# Altium PCB ZMBo.PcbDoc (part 3 of 3)
Units mil, origin at the board's own origin, x right, y up, seen from the top; angles counter-clockwise.
Board outline 6000 x 4000 mil, 4 copper layers (Top Layer, Groun Plane, Power Plane, Bottom Layer); 254 components, 259 nets, 1004 pads, 1790 vias.
Unrouted connection lines stored in the file: 212.
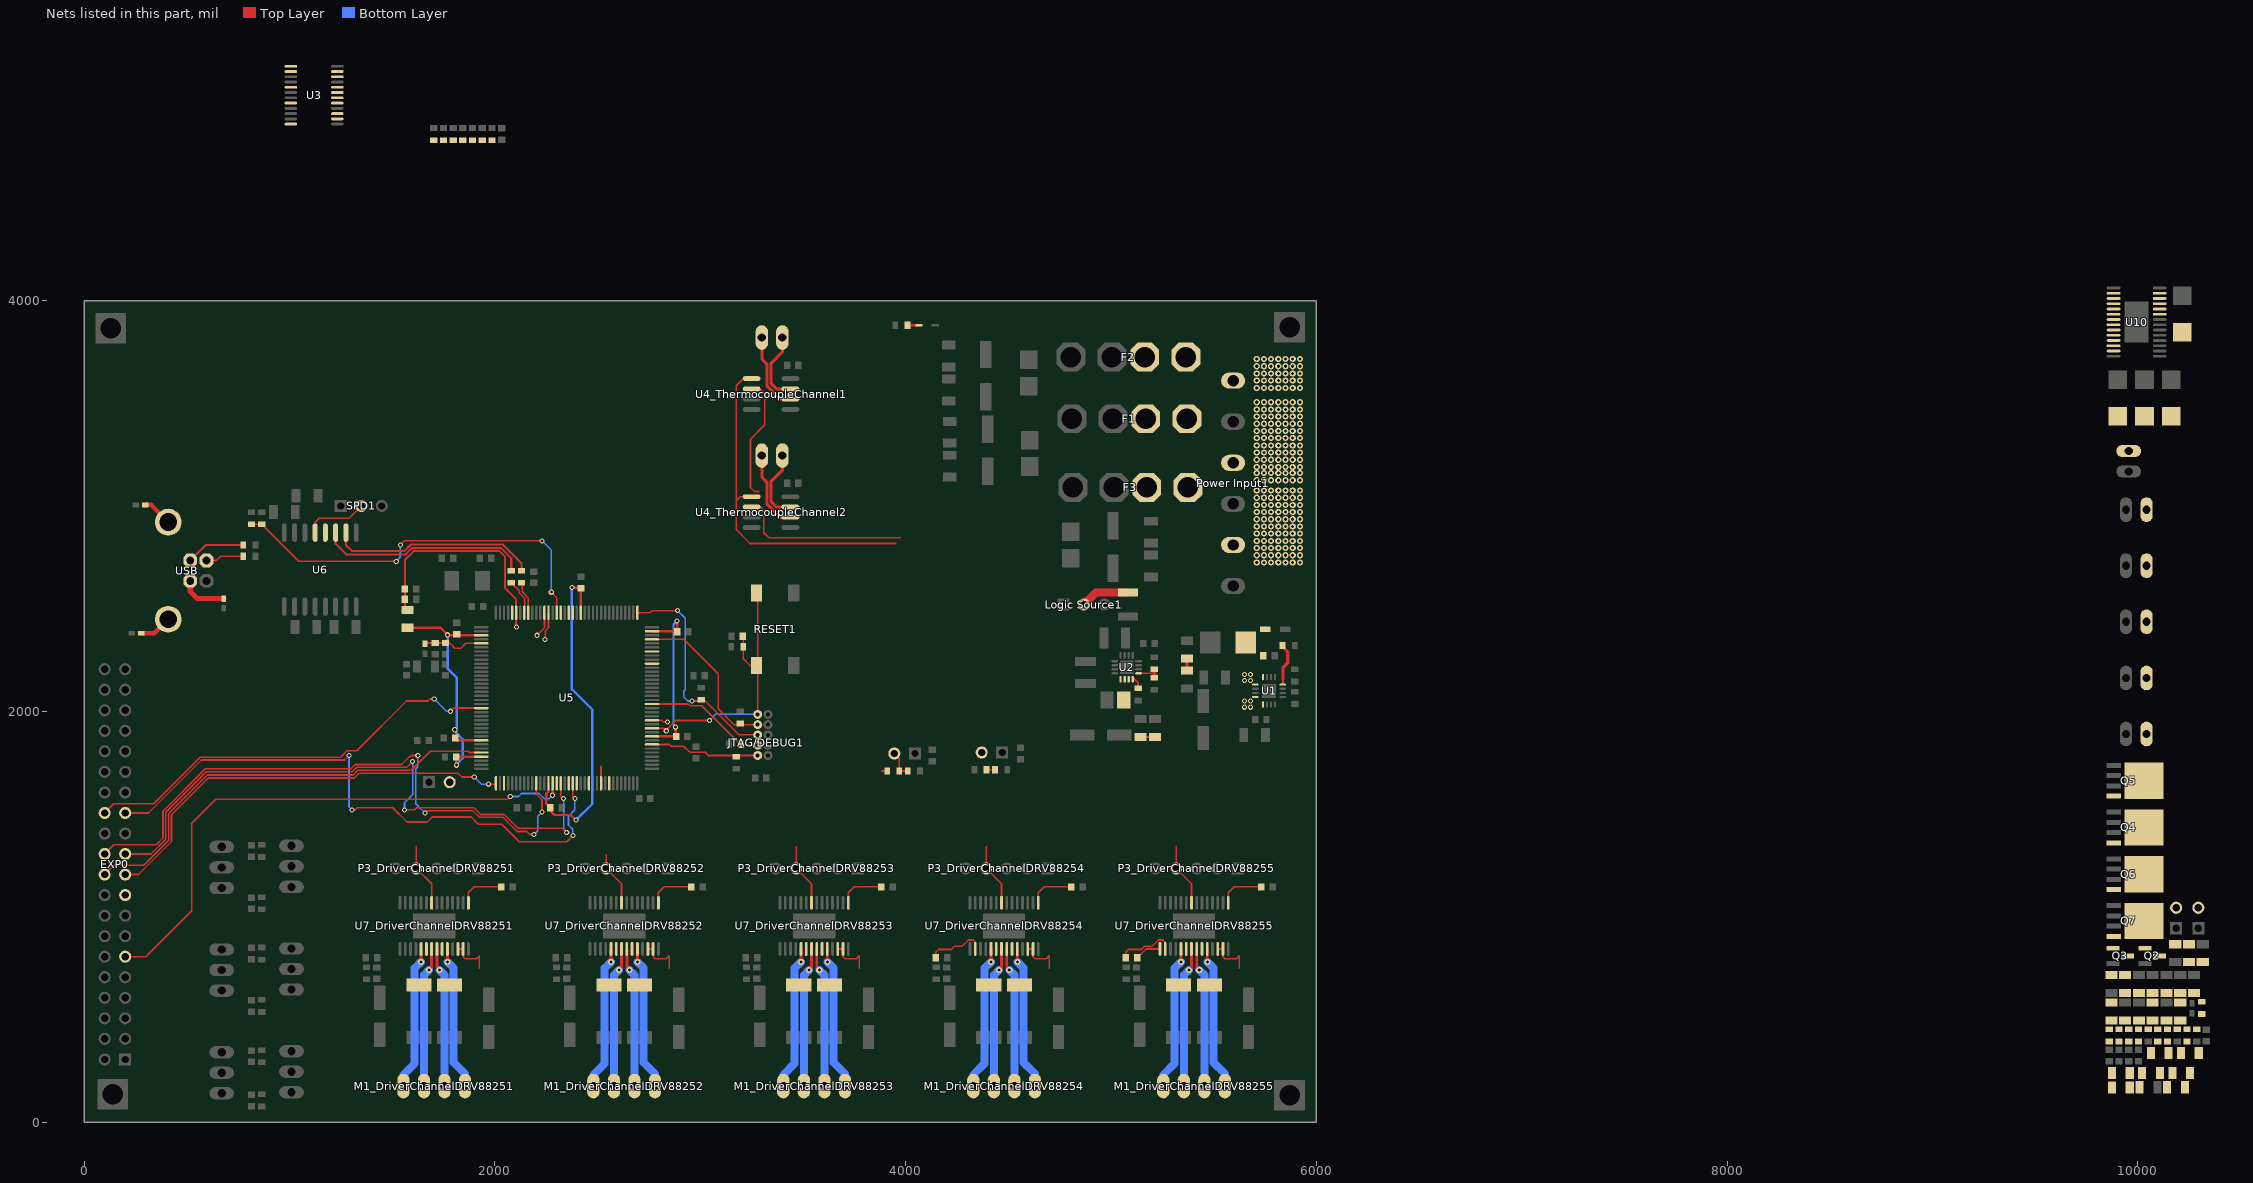
[diagram p5: the nets of this part, all layers, seen from the top]

## Via types
v1: diameter 30, hole 15, Top Layer to Bottom Layer, 1265 vias
v2: diameter 25, hole 15, Top Layer to Bottom Layer, 405 vias
v3: diameter 19.68, hole 7.87, Top Layer to Bottom Layer, 90 vias
v4: diameter 50, hole 20, Top Layer to Bottom Layer, 28 vias
v5: diameter 30, hole 20, Top Layer to Bottom Layer, 2 vias

## Nets (pads, with @x,y where several pads share a name; then routed paths per layer and width w, separated by ;. In a path a pad name is that pad's centre, name@x,y a point inside that pad or via, vN(x,y) a via of type N, cw(c..) or ccw(c..) an arc to the next point about the centre after c; other vN are vias at no path point) (continued)
NetC68_DriverChannelDRV88254_2: C68_DriverChannelDRV88254.2 U7_DriverChannelDRV88254.2 | length 280.9
  Top Layer w8: C68_DriverChannelDRV88254.2@4147.44,800 4147.44,827.44 4160,840 4222.76,840 4239.56,856.8 4276.8,856.8 4306.26,886.26 4328.74,886.26 4339.25,875.75 U7_DriverChannelDRV88254.2@4339.25,842.8
NetC68_DriverChannelDRV88255_1: C68_DriverChannelDRV88255.1 U7_DriverChannelDRV88255.1 | length 128.8
  Top Layer w8: C68_DriverChannelDRV88255.1@5127.56,800 5170.35,842.8 U7_DriverChannelDRV88255.1@5238.66,842.8
NetC68_DriverChannelDRV88255_2: C68_DriverChannelDRV88255.2 U7_DriverChannelDRV88255.2 | length 280.9
  Top Layer w8: C68_DriverChannelDRV88255.2@5072.44,800 5072.44,827.44 5085,840 5147.76,840 5164.56,856.8 5201.8,856.8 5231.26,886.26 5253.74,886.26 5264.25,875.75 U7_DriverChannelDRV88255.2@5264.25,842.8
NetC71_DriverChannelDRV88251_2: C71_DriverChannelDRV88251.2 U7_DriverChannelDRV88251.15 | length 222.1
  Top Layer w8: U7_DriverChannelDRV88251.15@1871.34,1067.2 1871.34,1116.34 1900,1145 C71_DriverChannelDRV88251.2@2032.44,1145
NetC71_DriverChannelDRV88252_2: C71_DriverChannelDRV88252.2 U7_DriverChannelDRV88252.15 | length 222.1
  Top Layer w8: U7_DriverChannelDRV88252.15@2796.34,1067.2 2796.34,1116.34 2825,1145 C71_DriverChannelDRV88252.2@2957.44,1145
NetC71_DriverChannelDRV88253_2: C71_DriverChannelDRV88253.2 U7_DriverChannelDRV88253.15 | length 222.1
  Top Layer w8: U7_DriverChannelDRV88253.15@3721.34,1067.2 3721.34,1116.34 3750,1145 C71_DriverChannelDRV88253.2@3882.44,1145
NetC71_DriverChannelDRV88254_2: C71_DriverChannelDRV88254.2 U7_DriverChannelDRV88254.15 | length 222.1
  Top Layer w8: U7_DriverChannelDRV88254.15@4646.34,1067.2 4646.34,1116.34 4675,1145 C71_DriverChannelDRV88254.2@4807.44,1145
NetC71_DriverChannelDRV88255_2: C71_DriverChannelDRV88255.2 U7_DriverChannelDRV88255.15 | length 222.1
  Top Layer w8: U7_DriverChannelDRV88255.15@5571.34,1067.2 5571.34,1116.34 5600,1145 C71_DriverChannelDRV88255.2@5732.44,1145
NetD1_2: D1.2 R1.1 | length 56.1
  Top Layer w12: R1.1@4009.53,3880 D1.2@4065.63,3880
NetD7_2: D7.2 R8.1 | length 58.5
  Top Layer w15: R8.1@5370,2198.31 D7.2@5370,2256.77
NetD9_2: D9.2 R11.1 | length 70.5
  Top Layer w10: R11.1@5144.58,1875 5215,1875 D9.2@5215.08,1875.08
NetD10_1: D10.1 R13.2
NetD10_2: D10.2 FAN-1.2 Q2.3 R14.2
NetD11_1: D11.1 R47.2 R48.2
NetD11_2: D11.2 FAN-2.2 Q3.3
NetD12_1: D12.1 D13.2 FAN-0.2 Q4.5 R57.2
NetD13_1: D13.1 R56.1
NetD14_1: D14.1 R60.1
NetD14_2: D14.2 D15.1 HEATBED.2 Q5.5 R61.2
NetD16_1: D16.1 R64.1
NetD16_2: D16.2 D17.1 HEAT-0.2 Q6.5 R65.2
NetD18_1: D18.1 R68.1
NetD18_2: D18.2 D19.1 HEAT-1.2 Q7.5 R69.2
NetDBGEN1_2: DBGEN1.2 R22.2 R29.1 | length 40.9
  Top Layer w8: R22.2@4394.53,1715 R29.1@4435.47,1715
NetEXP0_17: EXP0.17
NetF1_1: "Power Input1.3" F1.1
  other v1: 5710,3125 5745,3125 5780,3125 5815,3125 5850,3125 5885,3125 5920,3125 5710,3160 5745,3160 5780,3160 5815,3160 5850,3160 5885,3160 5920,3160 5710,3190 5745,3190 5780,3190 5815,3190 5850,3190 5885,3190 5920,3190 5710,3225 5745,3225 5780,3225 5815,3225 5850,3225 5885,3225 5920,3225 5710,3260 5745,3260 5780,3260 5815,3260 5850,3260 5885,3260 5920,3260 5710,3295 5745,3295 5780,3295 5815,3295 5850,3295 5885,3295 5920,3295 5710,3330 5745,3330 5780,3330 5815,3330 5850,3330 5885,3330 5920,3330 5710,3365 5745,3365 5780,3365 5815,3365 5850,3365 5885,3365 5920,3365 5710,3400 5745,3400 5780,3400 5815,3400 5850,3400 5885,3400 5920,3400 5710,3435 5745,3435 5780,3435 5815,3435 5850,3435 5885,3435 5920,3435 5710,3470 5745,3470 5780,3470 5815,3470 5850,3470 5885,3470 5920,3470 5710,3505 5745,3505 5780,3505 5815,3505 5850,3505 5885,3505 5920,3505
NetF2_1: "Power Input1.1" F2.1
  other v1: 5710,3575 5745,3575 5780,3575 5815,3575 5850,3575 5885,3575 5920,3575 5710,3610 5745,3610 5780,3610 5815,3610 5850,3610 5885,3610 5920,3610 5710,3645 5745,3645 5780,3645 5815,3645 5850,3645 5885,3645 5920,3645 5710,3680 5745,3680 5780,3680 5815,3680 5850,3680 5885,3680 5920,3680 5710,3715 5745,3715 5780,3715 5815,3715 5850,3715 5885,3715 5920,3715
NetF3_1: "Power Input1.5" F3.1
  other v1: 5710,2725 5745,2725 5780,2725 5815,2725 5850,2725 5885,2725 5920,2725 5710,2760 5745,2760 5780,2760 5815,2760 5850,2760 5885,2760 5920,2760 5710,2795 5745,2795 5780,2795 5815,2795 5850,2795 5885,2795 5920,2795 5710,2830 5745,2830 5780,2830 5815,2830 5850,2830 5885,2830 5920,2830 5710,2865 5745,2865 5780,2865 5815,2865 5850,2865 5885,2865 5920,2865 5710,2900 5745,2900 5780,2900 5815,2900 5850,2900 5885,2900 5920,2900 5710,2935 5745,2935 5780,2935 5815,2935 5850,2935 5885,2935 5920,2935 5710,2970 5745,2970 5780,2970 5815,2970 5850,2970 5885,2970 5920,2970 5710,3005 5745,3005 5780,3005 5815,3005 5850,3005 5885,3005 5920,3005 5710,3040 5745,3040 5780,3040 5815,3040 5850,3040 5885,3040 5920,3040 5710,3075 5745,3075 5780,3075 5815,3075 5850,3075 5885,3075 5920,3075
NetF4_2: "Logic Source1.2" F4.2 | length 239.5
  Top Layer w40: 4868.58,2520.04 4927.64,2579.09 F4.2@5083.58,2579.09
NetFB6_2: FB6.2 USB.6 | length 159.5
  Top Layer w22: FB6.2@278.62,2380 342,2380 USB.6@410,2448
NetFB7_2: FB7.2 USB.4 | length 229.2
  Top Layer w25: USB.4@517,2635 517,2583 551.38,2548.62 FB7.2@680,2548.62
NetFB8_2: FB8.2 USB.5 | length 146.1
  Top Layer w22: FB8.2@298.62,3005 326.22,3005 USB.5@410,2921.22
"NetFET kRESET_2": "FET kRESET.2" "FET MCU RESET.2" R49.1
NetL2_1: L2.1 U2.1 U2.2 U2.3
NetM1_DriverChannelDRV88251_1: M1_DriverChannelDRV88251.1 U7_DriverChannelDRV88251.5 | length 703.4
  Top Layer w14: v1(1641.02,780) U7_DriverChannelDRV88251.5@1641.02,842.8
  Bottom Layer w39: M1_DriverChannelDRV88251.1@1555,175 1555,230 1610,285 1610,748.98 v1(1641.02,780)
NetM1_DriverChannelDRV88251_2: M1_DriverChannelDRV88251.2 U7_DriverChannelDRV88251.7 | length 683.2
  Top Layer w14: v1(1680,740) 1692.2,752.2 U7_DriverChannelDRV88251.7@1692.2,842.8
  Bottom Layer w39: M1_DriverChannelDRV88251.2@1655,175 1655,715 v1(1680,740)
NetM1_DriverChannelDRV88251_3: M1_DriverChannelDRV88251.3 U7_DriverChannelDRV88251.8 | length 665.9
  Top Layer w14: 1717.8,753.23 U7_DriverChannelDRV88251.8@1717.8,842.8
  Bottom Layer w39: v1(1730,741.02) 1755,716.02 M1_DriverChannelDRV88251.3@1755,175
NetM1_DriverChannelDRV88251_4: M1_DriverChannelDRV88251.4 U7_DriverChannelDRV88251.10 | length 700
  Top Layer w14: v1@1768.98,782.98 U7_DriverChannelDRV88251.10@1768.98,842.8
  Bottom Layer w39: v1(1770,780) 1800,750 1800,290 1855,235 M1_DriverChannelDRV88251.4@1855,175
NetM1_DriverChannelDRV88252_1: M1_DriverChannelDRV88252.1 U7_DriverChannelDRV88252.5 | length 703.4
  Top Layer w14: v1(2566.02,780) U7_DriverChannelDRV88252.5@2566.02,842.8
  Bottom Layer w39: M1_DriverChannelDRV88252.1@2480,175 2480,230 2535,285 2535,748.98 v1(2566.02,780)
NetM1_DriverChannelDRV88252_2: M1_DriverChannelDRV88252.2 U7_DriverChannelDRV88252.7 | length 683.2
  Top Layer w14: v1(2605,740) 2617.2,752.2 U7_DriverChannelDRV88252.7@2617.2,842.8
  Bottom Layer w39: M1_DriverChannelDRV88252.2@2580,175 2580,715 v1(2605,740)
NetM1_DriverChannelDRV88252_3: M1_DriverChannelDRV88252.3 U7_DriverChannelDRV88252.8 | length 665.9
  Top Layer w14: 2642.8,753.23 U7_DriverChannelDRV88252.8@2642.8,842.8
  Bottom Layer w39: v1(2655,741.02) 2680,716.02 M1_DriverChannelDRV88252.3@2680,175
NetM1_DriverChannelDRV88252_4: M1_DriverChannelDRV88252.4 U7_DriverChannelDRV88252.10 | length 700
  Top Layer w14: v1@2693.98,782.98 U7_DriverChannelDRV88252.10@2693.98,842.8
  Bottom Layer w39: v1(2695,780) 2725,750 2725,290 2780,235 M1_DriverChannelDRV88252.4@2780,175
NetM1_DriverChannelDRV88253_1: M1_DriverChannelDRV88253.1 U7_DriverChannelDRV88253.5 | length 703.4
  Top Layer w14: v1(3491.02,780) U7_DriverChannelDRV88253.5@3491.02,842.8
  Bottom Layer w39: M1_DriverChannelDRV88253.1@3405,175 3405,230 3460,285 3460,748.98 v1(3491.02,780)
NetM1_DriverChannelDRV88253_2: M1_DriverChannelDRV88253.2 U7_DriverChannelDRV88253.7 | length 683.2
  Top Layer w14: v1(3530,740) 3542.2,752.2 U7_DriverChannelDRV88253.7@3542.2,842.8
  Bottom Layer w39: M1_DriverChannelDRV88253.2@3505,175 3505,715 v1(3530,740)
NetM1_DriverChannelDRV88253_3: M1_DriverChannelDRV88253.3 U7_DriverChannelDRV88253.8 | length 665.9
  Top Layer w14: 3567.8,753.23 U7_DriverChannelDRV88253.8@3567.8,842.8
  Bottom Layer w39: v1(3580,741.02) 3605,716.02 M1_DriverChannelDRV88253.3@3605,175
NetM1_DriverChannelDRV88253_4: M1_DriverChannelDRV88253.4 U7_DriverChannelDRV88253.10 | length 700
  Top Layer w14: v1@3618.98,782.98 U7_DriverChannelDRV88253.10@3618.98,842.8
  Bottom Layer w39: v1(3620,780) 3650,750 3650,290 3705,235 M1_DriverChannelDRV88253.4@3705,175
NetM1_DriverChannelDRV88254_1: M1_DriverChannelDRV88254.1 U7_DriverChannelDRV88254.5 | length 703.4
  Top Layer w14: v1(4416.02,780) U7_DriverChannelDRV88254.5@4416.02,842.8
  Bottom Layer w39: M1_DriverChannelDRV88254.1@4330,175 4330,230 4385,285 4385,748.98 v1(4416.02,780)
NetM1_DriverChannelDRV88254_2: M1_DriverChannelDRV88254.2 U7_DriverChannelDRV88254.7 | length 683.2
  Top Layer w14: v1(4455,740) 4467.2,752.2 U7_DriverChannelDRV88254.7@4467.2,842.8
  Bottom Layer w39: M1_DriverChannelDRV88254.2@4430,175 4430,715 v1(4455,740)
NetM1_DriverChannelDRV88254_3: M1_DriverChannelDRV88254.3 U7_DriverChannelDRV88254.8 | length 665.9
  Top Layer w14: 4492.8,753.23 U7_DriverChannelDRV88254.8@4492.8,842.8
  Bottom Layer w39: v1(4505,741.02) 4530,716.02 M1_DriverChannelDRV88254.3@4530,175
NetM1_DriverChannelDRV88254_4: M1_DriverChannelDRV88254.4 U7_DriverChannelDRV88254.10 | length 700
  Top Layer w14: v1@4543.98,782.98 U7_DriverChannelDRV88254.10@4543.98,842.8
  Bottom Layer w39: v1(4545,780) 4575,750 4575,290 4630,235 M1_DriverChannelDRV88254.4@4630,175
NetM1_DriverChannelDRV88255_1: M1_DriverChannelDRV88255.1 U7_DriverChannelDRV88255.5 | length 703.4
  Top Layer w14: v1(5341.02,780) U7_DriverChannelDRV88255.5@5341.02,842.8
  Bottom Layer w39: M1_DriverChannelDRV88255.1@5255,175 5255,230 5310,285 5310,748.98 v1(5341.02,780)
NetM1_DriverChannelDRV88255_2: M1_DriverChannelDRV88255.2 U7_DriverChannelDRV88255.7 | length 683.2
  Top Layer w14: v1(5380,740) 5392.2,752.2 U7_DriverChannelDRV88255.7@5392.2,842.8
  Bottom Layer w39: M1_DriverChannelDRV88255.2@5355,175 5355,715 v1(5380,740)
NetM1_DriverChannelDRV88255_3: M1_DriverChannelDRV88255.3 U7_DriverChannelDRV88255.8 | length 665.9
  Top Layer w14: 5417.8,753.23 U7_DriverChannelDRV88255.8@5417.8,842.8
  Bottom Layer w39: v1(5430,741.02) 5455,716.02 M1_DriverChannelDRV88255.3@5455,175
NetM1_DriverChannelDRV88255_4: M1_DriverChannelDRV88255.4 U7_DriverChannelDRV88255.10 | length 700
  Top Layer w14: v1@5468.98,782.98 U7_DriverChannelDRV88255.10@5468.98,842.8
  Bottom Layer w39: v1(5470,780) 5500,750 5500,290 5555,235 M1_DriverChannelDRV88255.4@5555,175
NetQ2_1: Q2.1 R45.2
NetQ3_1: Q3.1 R52.2
NetQ4_4: Q4.4 R58.2
NetQ5_4: Q5.4 R62.2
NetQ6_4: Q6.4 R66.2
NetQ7_4: Q7.4 R70.2
NetR12_1: R12.1 U2.4 | length 60.4
  Top Layer w10: U2.4@5106.11,2156.24 5114.65,2156.24 5132.58,2138.31 R12.1@5132.58,2111.83
NetR14_1: R14.1 U10.3
NetR15_1: R15.1 R16.1 U5.129 | length 1945.3
  Top Layer w8: R15.1@815,2910.47 R16.1@865,2910.47 1045.47,2730 v2(1520,2730) ; v2(1540,2810) 1560,2830 v2(2230,2830) ; v2(2275,2580) 2300.79,2554.21 U5.129@2300.79,2480.35
  Bottom Layer w8: v2(1520,2730) 1540,2750 v2(1540,2810) ; v2(2230,2830) 2275,2785 v2(2275,2580)
NetR17_2: R17.2 U6.10 | length 1014.4
  Top Layer w10: U6.10@1275,2870.12 1275,2810 1305,2780 1559.75,2780 1591.75,2812 2038,2812 2130,2720 R17.2@2130,2684.53
NetR18_2: R18.2 USB.2 | length 188.1
  Top Layer w8: USB.2@596,2734.21 644.21,2734.21 665,2755 R18.2@775.47,2755
NetR19_2: R19.2 U6.11 | length 1026.6
  Top Layer w10: U6.11@1225,2870.12 1225,2815 1276,2764 1566.37,2764 1598.37,2796 2029.86,2796 2080,2745.86 R19.2@2080,2684.53
NetR20_2: R20.2 USB.3 | length 294
  Top Layer w10: USB.3@517,2734.21 592.79,2810 765.47,2810 R20.2@775.47,2820
NetR23_2: R23.2 R28.2 TRST1.2 | length 136.1
  Top Layer w8: TRST1.2@3945.47,1794.53 3970,1770 R23.2@3970,1709.53 R28.2@4010.94,1709.53
NetR31_1: R31.1 U3.1 U3.12 U3.15 U3.18 U3.19 U3.22
NetR32_DriverChannelDRV88251_2: R32_DriverChannelDRV88251.2 U7_DriverChannelDRV88251.9
NetR32_DriverChannelDRV88252_2: R32_DriverChannelDRV88252.2 U7_DriverChannelDRV88252.9
NetR32_DriverChannelDRV88253_2: R32_DriverChannelDRV88253.2 U7_DriverChannelDRV88253.9
NetR32_DriverChannelDRV88254_2: R32_DriverChannelDRV88254.2 U7_DriverChannelDRV88254.9
NetR32_DriverChannelDRV88255_2: R32_DriverChannelDRV88255.2 U7_DriverChannelDRV88255.9
NetR33_DriverChannelDRV88251_2: R33_DriverChannelDRV88251.2 U7_DriverChannelDRV88251.6
NetR33_DriverChannelDRV88252_2: R33_DriverChannelDRV88252.2 U7_DriverChannelDRV88252.6
NetR33_DriverChannelDRV88253_2: R33_DriverChannelDRV88253.2 U7_DriverChannelDRV88253.6
NetR33_DriverChannelDRV88254_2: R33_DriverChannelDRV88254.2 U7_DriverChannelDRV88254.6
NetR33_DriverChannelDRV88255_2: R33_DriverChannelDRV88255.2 U7_DriverChannelDRV88255.6
NetR37_1: R37.1 R38.2 U2.5 | length 117.4
  Top Layer w8: U2.5@5134.65,2184.78 5211.11,2184.78
  Top Layer w20: R37.1@5211.58,2163.83 R38.2@5211.58,2204.78
NetR39_1: R39.1 U5.65
NetR40_1: R40.1 U5.63 | length 83
  Top Layer w8: U5.63@2517.32,1649.65 2517.32,1732.68
NetR41_1: R41.1 U5.60
NetR42_1: R42.1 U5.57
NetR43_1: R43.1 U5.55
NetR44_1: R44.1 U5.52
NetR45_1: R45.1 R46.1 U10.2
NetR48_1: R48.1 U10.5
NetR49_2: R49.2 U10.27
NetR50_2: R50.2 U10.26
NetR51_2: R51.2 U10.25
NetR52_1: R52.1 R55.1 U10.4
NetR53_2: R53.2 U10.24
NetR54_2: R54.2 U10.23
NetR57_1: R57.1 U10.7
NetR58_1: R58.1 R59.1 U10.6
NetR61_1: R61.1 U10.9
NetR62_1: R62.1 R63.1 U10.8
NetR65_1: R65.1 U10.11
NetR66_1: R66.1 R67.1 U10.10
NetR69_1: R69.1 U10.13
NetR70_1: R70.1 R71.1 U10.12
NetSPD1_2: SPD1.2 U6.13 | length 308
  Top Layer w8: U6.13@1125,2870.12 1125,2920 1145,2940 1290,2940 SPD1.2@1350,3000
NetT2_ThermocoupleChannel1_1: T2_ThermocoupleChannel1.1 U4_ThermocoupleChannel1.3 | length 351.9
  Top Layer w15: T2_ThermocoupleChannel1.1@3400,3820 3400,3749.49 3345.51,3695 3345.51,3595 3370.51,3570 U4_ThermocoupleChannel1.3@3439.49,3570
NetT2_ThermocoupleChannel1_2: T2_ThermocoupleChannel1.2 U4_ThermocoupleChannel1.2 | length 386.5
  Top Layer w15: T2_ThermocoupleChannel1.2@3300,3820 3300,3715.51 3324.51,3691 3324.51,3586 3390.51,3520 U4_ThermocoupleChannel1.2@3439.49,3520
NetT2_ThermocoupleChannel2_1: T2_ThermocoupleChannel2.1 U4_ThermocoupleChannel2.3 | length 351.9
  Top Layer w15: T2_ThermocoupleChannel2.1@3400,3245 3400,3174.49 3345.51,3120 3345.51,3020 3370.51,2995 U4_ThermocoupleChannel2.3@3439.49,2995
NetT2_ThermocoupleChannel2_2: T2_ThermocoupleChannel2.2 U4_ThermocoupleChannel2.2 | length 386.5
  Top Layer w15: T2_ThermocoupleChannel2.2@3300,3245 3300,3140.51 3324.51,3116 3324.51,3011 3390.51,2945 U4_ThermocoupleChannel2.2@3439.49,2945
NetU5_140: U5.140 U6.12
PG: R9.2 U1.8 | length 214
  Top Layer w10: U1.8@5836.93,2129.53 5836.93,2155
  Top Layer w15: 5836.93,2155 5836.93,2211.93 5861,2236 5861,2289 5836.93,2313.07 R9.2@5836.93,2323.54
POT_CS: U3.5 U5.39
REF: U7_DriverChannelDRV88251.12 U7_DriverChannelDRV88251.13 U7_DriverChannelDRV88252.12 U7_DriverChannelDRV88252.13 U7_DriverChannelDRV88253.12 U7_DriverChannelDRV88253.13 U7_DriverChannelDRV88254.12 U7_DriverChannelDRV88254.13 U7_DriverChannelDRV88255.12 U7_DriverChannelDRV88255.13 | length 1067.2
  Top Layer w8: U7_DriverChannelDRV88251.12@1820.16,842.8 U7_DriverChannelDRV88251.13@1845.75,842.8 1845.75,804.25 1855,795 1910,795 1925,810 1925,750 ; U7_DriverChannelDRV88252.12@2745.16,842.8 U7_DriverChannelDRV88252.13@2770.75,842.8 2770.75,804.25 2780,795 2835,795 2850,810 2850,750 ; U7_DriverChannelDRV88253.12@3670.16,842.8 U7_DriverChannelDRV88253.13@3695.75,842.8 3695.75,804.25 3705,795 3760,795 3775,810 3775,750 ; U7_DriverChannelDRV88254.12@4595.16,842.8 U7_DriverChannelDRV88254.13@4620.75,842.8 4620.75,804.25 4630,795 4685,795 4700,810 4700,750 ; U7_DriverChannelDRV88255.12@5520.16,842.8 U7_DriverChannelDRV88255.13@5545.75,842.8 5545.75,804.25 5555,795 5610,795 5625,810 5625,750
REF1: U3.2
REF2: U3.23
REF3: U3.20
REF4: U3.17
REF5: U3.14
REF_EXP1: EXP0.21 U5.53 | length 3010.2
  Top Layer w8: EXP0.21@200,1305 325.6,1305 398,1377.4 398,1508 595,1705 1305,1705 1327,1727 1572,1727 v2(1600,1755) ; v2(1560,1520) 1610,1520 1620,1530 1898.99,1530 1931.49,1497.5 2045.76,1497.5 2092.32,1450.94 2092.65,1450.94 2113.59,1430 2330,1430 v2(2350,1410) ; U5.53@2320.47,1649.65 2320.47,1589.53 v2(2335,1575)
  Bottom Layer w8: v2(1560,1520) 1560,1555 1600,1595 v2(1600,1755) ; v2(2335,1575) 2335,1425 v2(2350,1410)
REF_EXP2: EXP0.22 U5.47 | length 2962.7
  Top Layer w8: EXP0.22@100,1305 145,1350 350.8,1350 384,1383.2 384,1514 590,1720 1300,1720 1321,1741 1546,1741 1590,1785 v2(1625,1785) ; v2(1660,1505) 1670,1515 1894.2,1515 1925.7,1483.5 2039.96,1483.5 2086.52,1436.94 2086.85,1436.94 2108.79,1415 2155,1415 2170,1400 v2(2190,1400) ; U5.47@2202.36,1649.65 2202.36,1597.44 2230,1569.8 v2(2230,1510)
  Bottom Layer w8: v2(1625,1785) 1625,1730 1615,1720 1615,1550 v2(1660,1505) ; v2(2190,1400) 2209,1419 2209,1489 v2(2230,1510)
RESET: C63.2 JTAG/DEBUG1.10 kRESET.2 R21.1 RESET1.1 U5.83 | length 1336.4
  Top Layer w8: U5.83@2765.35,1917.36 2822.64,1917.36 v2(2835,1905) 2835,1909.38 2880.62,1955 v2(3045,1955) ; C63.2@3207.56,2365 3209.53,2363.03 R21.1@3209.53,2315 3209.53,2255.47 3242.17,2222.83 RESET1.1@3274.45,2222.83 ; RESET1.1@3279.45,2577.17 3279.45,2222.83 3280,2217.28 JTAG/DEBUG1.10@3280,1985
  Bottom Layer w8: v2(3045,1955) 3075,1985 JTAG/DEBUG1.10@3280,1985
RXD1: EXP0.20 U5.32 | length 2162.2
  Top Layer w8: EXP0.20@100,1205 145,1250 290.4,1250 412,1371.6 412,1502 600,1690 1310,1690 1333,1713 1593,1713 1685.28,1805.28 1869.72,1805.28 1875.75,1799.25 U5.32@1934.65,1799.25
SCLK: EXP0.11 R51.1 U3.8 U4_ThermocoupleChannel1.5 U4_ThermocoupleChannel2.5 U5.51 | length 4416.1
  Top Layer w8: EXP0.11@200,805 300.4,805 524,1028.6 524,1455.61 640.39,1572 2062,1572 v2(2075,1585) ; v2(2281.1,1591.1) U5.51@2281.1,1649.65 ; U4_ThermocoupleChannel2.5@3250.51,3045 3195,3045 3175,3025 ; U4_ThermocoupleChannel1.5@3250.51,3620 3210,3620 3175,3585 3175,3025 ; 3953,2817 3243,2817 3175,2885 3175,3025
  Bottom Layer w8: v2(2075,1585) 2115,1585 2130,1600 2215,1600 2240,1575 2265,1575 v2(2281.1,1591.1)
STEP: P3_DriverChannelDRV88251.4 P3_DriverChannelDRV88252.4 P3_DriverChannelDRV88253.4 P3_DriverChannelDRV88254.4 P3_DriverChannelDRV88255.4 U7_DriverChannelDRV88251.22 U7_DriverChannelDRV88252.22 U7_DriverChannelDRV88253.22 U7_DriverChannelDRV88254.22 U7_DriverChannelDRV88255.22 | length 1488.7
  Top Layer w8: 1617.5,1342.5 P3_DriverChannelDRV88251.4@1617.5,1235 1692.2,1160.3 U7_DriverChannelDRV88251.22@1692.2,1067.2 ; 2542.5,1300 P3_DriverChannelDRV88252.4@2542.5,1235 2617.2,1160.3 U7_DriverChannelDRV88252.22@2617.2,1067.2 ; 3467.5,1342.5 P3_DriverChannelDRV88253.4@3467.5,1235 3542.2,1160.3 U7_DriverChannelDRV88253.22@3542.2,1067.2 ; 4392.5,1342.5 P3_DriverChannelDRV88254.4@4392.5,1235 4467.2,1160.3 U7_DriverChannelDRV88254.22@4467.2,1067.2 ; 5317.5,1342.5 P3_DriverChannelDRV88255.4@5317.5,1235 5392.2,1160.3 U7_DriverChannelDRV88255.22@5392.2,1067.2
STEP1: U5.132 | length 125.6
  Top Layer w8: v2(2205,2370) 2241.73,2406.73 U5.132@2241.73,2480.35
STEP2: U5.131 | length 137.2
  Top Layer w8: v2(2245,2350) 2245,2390 2261.42,2406.42 U5.131@2261.42,2480.35
STEP3: U5.128
STEP4: U5.126
STEP5: U5.125
STEP_EXP1: EXP0.25 U5.56 | length 2937.9
  Top Layer w8: EXP0.25@200,1505 313.99,1505 571.99,1763 1268,1763 v2(1290,1785) ; v2(1305,1520) 1320,1520 1330,1530 1503.18,1530 1572.18,1461 1671.8,1461 1695.8,1485 1884.6,1485 1919.6,1450 2033.87,1450 2074.93,1408.94 2075.25,1408.94 2119.2,1365 2350,1365 v2(2380,1395) ; U5.56@2379.53,1649.65 2379.53,1585.47 v2(2390,1575)
  Bottom Layer w8: v2(1290,1785) 1290,1535 v2(1305,1520) ; v2(2380,1395) 2380,1425 2358.5,1446.5 2358.5,1489.24 2389.94,1520.68 2389.94,1574.94 v2(2390,1575)
STEP_EXP2: EXP0.26 U5.21 | length 2095.9
  Top Layer w8: EXP0.26@100,1505 145,1550 339.2,1550 566.2,1777 1250.18,1777 1280.68,1807.5 1327.5,1807.5 1570,2050 1675,2050 1685,2060 v2(1705,2060) ; v2(1785,2000) 1800.79,2015.79 U5.21@1934.65,2015.79
  Bottom Layer w8: v2(1705,2060) 1765,2000 v2(1785,2000)
SW: C7.1 D5.2 L1.1 U1.1 U1.12 U1.13 U1.16
  other v2: 5650,2020 5680,2020 5650,2050 5680,2050 5650,2150 5680,2150 5650,2180 5680,2180
TC_CS: U4_ThermocoupleChannel1.6 U4_ThermocoupleChannel2.6 | length 1458.2
  Top Layer w8: U4_ThermocoupleChannel2.6@3250.51,2995 3295,2995 3310,2980 3310,2870 3335,2845 3975,2845 ; U4_ThermocoupleChannel1.6@3250.51,3570 3290,3570 3315,3545 3315,3395 3245,3325 3245,3090 3265,3070 3285,3070
TC_CS1: U5.99
TC_CS2: U5.102
TCK/SWDCLK: JTAG/DEBUG1.4 R25.1 U5.89 | length 597.7
  Top Layer w8: U5.89@2765.35,2035.47 2942.71,2035.47 2950.68,2027.5 3007.5,2027.5 3200,1835 JTAG/DEBUG1.4@3280,1835
TDI: JTAG/DEBUG1.8 R27.1 U5.105 | length 786.3
  Top Layer w8: U5.105@2765.35,2350.43 2919.57,2350.43 3087.5,2182.5 3087.5,2012.5 3165,1935 JTAG/DEBUG1.8@3280,1935
TDO/SWO: JTAG/DEBUG1.6 R26.1 U5.109 | length 1074.8
  Top Layer w8: U5.109@2694.49,2480.35 2755.35,2480.35 2765,2490 v2(2890,2490) ; v2(2960,2050) 3025,2050 3190,1885 JTAG/DEBUG1.6@3280,1885
  Bottom Layer w8: v2(2890,2490) 2927.5,2452.5 2927.5,2105.68 2920,2098.18 2920,2070 2940,2050 v2(2960,2050)
TMS/SWDIO: JTAG/DEBUG1.2 R24.1 U5.79 | length 536.9
  Top Layer w8: U5.79@2765.35,1838.62 2851.14,1838.62 2859.77,1830 2920,1830 2950,1800 3024.26,1800 3039.26,1785 JTAG/DEBUG1.2@3280,1785
TRST: R23.1 U5.85 | length 105.2
  Top Layer w8: U5.85@2765.35,1956.73 2813.27,1956.73 2821.63,1948.37 v2(2841.63,1948.37) ; 3885.47,1709.53 R23.1@3910.94,1709.53
TXD1: EXP0.19 U5.37 | length 2110.8
  Top Layer w8: EXP0.19@200,1205 265.2,1205 426,1365.8 426,1496.2 604.8,1675 1314.8,1675 1338.8,1699 1821,1699 1840,1680 v2(1900,1680) ; v2(1970,1645) 2000.87,1645 U5.37@2005.51,1649.65
  Bottom Layer w8: v2(1900,1680) 1935,1645 v2(1970,1645)
UDM_N: R19.1 U5.137 | length 170.3
  Top Layer w8: R19.1@2080,2625.47 2118.94,2586.54 2118.94,2576.06 2145,2550 U5.137@2145,2482.05
UDP_P: R17.1 U5.136 | length 158.8
  Top Layer w8: R17.1@2130,2625.47 2132.94,2622.54 2132.94,2581.86 2162.99,2551.81 U5.136@2162.99,2480.35
VDDIN: C54.2 C55.2 FB5.2 U5.5 | length 296.2
  Top Layer w8: FB5.2@1660,2328.62 1663.94,2332.56 C54.2@1710,2332.56 C55.2@1760,2332.56 1780,2332.56 1805,2307.56 1835,2307.56 1858.19,2330.75 U5.5@1934.65,2330.75
VDDOUT: C36.2 C37.2 C38.2 C39.2 C40.2 C41.2 C42.2 FB4.1 U5.3 U5.29 U5.33 U5.50 U5.81 U5.107 U5.123 | length 3864.4
  Top Layer w12: FB4.1@1575,2406.69 1735.87,2406.69 v2(1770,2372.56) ; v2@1772.56,2370 C36.2@1815,2370 ; v2(1812.56,1737.56) C39.2@1812.56,1777.56 ; C39.2@1812.56,1779.57 U5.33@1934.65,1779.57 ; C40.2@1812.56,1858.31 U5.29@1934.65,1858.31 ; C36.2@1812.56,2370.12 U5.3@1934.65,2370.12 ; U5.50@2261.42,1649.65 2261.42,1609.04 2250,1597.63 2250,1549.88 C41.2@2269.88,1530 2269.88,1515.12 2290,1495 2370,1495 v2(2395,1470) ; v2(2375,2602.56) 2417.44,2602.56 C42.2@2418.9,2601.1 ; U5.123@2418.9,2480.35 C42.2@2418.9,2601.1 ; C42.2@2418.9,2602.44 C42.2@2418.9,2601.1 ; C42.2@2420,2600 C42.2@2418.9,2601.1 ; U5.81@2765.35,1877.99 C38.2@2882.01,1877.99 ; U5.107@2765.35,2389.8 C37.2@2887.44,2389.8 ; C38.2@2880,1880 v2(2880,1922.56) ; C38.2@2882.44,1877.56 C38.2@2882.01,1877.99 ; C38.2@2887.44,1877.99 C38.2@2882.01,1877.99 ; C37.2@2887.44,2387.56 C37.2@2887.44,2389.8 ; v2(2887.44,2440) C37.2@2887.44,2389.8
  Bottom Layer w12: v2(1770,2372.56) 1770,2207.56 1815,2162.56 1815,1920 v2(1805,1910) ; v2(1812.56,1737.56) 1812.56,1740.19 1844,1771.63 1844,1863.37 1812.56,1894.81 1812.56,1897.56 ; v2(2375,2602.56) 2375,2107.56 2475,2007.56 2475,1550 v2(2395,1470) ; v2(2880,1922.56) 2870,1932.56 2870,2422.56 v2(2887.44,2440)
VDDPLL: C32.2 C33.2 FB4.2 U5.139 | length 1130.1
  Top Layer w10: FB4.2@1575,2493.31 1562.44,2505.87 C32.2@1562.44,2545 C33.2@1562.44,2595 1562.44,2737.44 1605,2780 2023.23,2780 2048.5,2754.73 2048.5,2601.5 2103.94,2546.06 U5.139@2103.94,2480.35 v2@2103.94,2411.06
  other v2: 2105,2410
pads on no net: JTAG/DEBUG1.1@3361.5,1709.41 JTAG/DEBUG1.7 R22.1 U1.6 U1.7 U3.11 U4_ThermocoupleChannel1.8 U4_ThermocoupleChannel2.8 U5.1 U5.11 U5.17 U5.18 U5.19 U5.66 U5.71 U5.75 U5.76 U5.93 U5.106 U5.108 U5.112 U5.114 U5.116 U5.118 U5.119 U5.121 U5.130 U5.133 U5.144 U7_DriverChannelDRV88251.18 U7_DriverChannelDRV88251.19 U7_DriverChannelDRV88251.23 U7_DriverChannelDRV88251.27 U7_DriverChannelDRV88252.18 U7_DriverChannelDRV88252.19 U7_DriverChannelDRV88252.23 U7_DriverChannelDRV88252.27 U7_DriverChannelDRV88253.18 U7_DriverChannelDRV88253.19 U7_DriverChannelDRV88253.23 U7_DriverChannelDRV88253.27 U7_DriverChannelDRV88254.18 U7_DriverChannelDRV88254.19 U7_DriverChannelDRV88254.23 U7_DriverChannelDRV88254.27 U7_DriverChannelDRV88255.18 U7_DriverChannelDRV88255.19 U7_DriverChannelDRV88255.23 U7_DriverChannelDRV88255.27
copper on no net: | length 5141.3
  Top Layer w8: 1979.53,800 1980,800.47 v1(1980,845) ; 2904.53,800 2905,800.47 v1(2905,845) ; 3829.53,800 3830,800.47 v1(3830,845) ; 4754.53,800 4755,800.47 v1(4755,845) ; 5679.53,800 5680,800.47 v1(5680,845)
  Top Layer w10: 1977.56,750 v1(2025,750) ; 2902.56,750 v1(2950,750) ; 3680,2907.44 3744.49,2907.44 3745,2907.95 3745,2890 3760,2875 v2(3775,2875) ; 3680,3482.44 3744.49,3482.44 3745,3482.95 v2(3745,3435) ; 3745,2961.1 3745,3022.95 ; 3745,3536.1 3745,3597.95 ; 3827.56,750 v1(3875,750) ; 4752.56,750 v1(4800,750) ; 5677.56,750 v1(5725,750)
  Top Layer w15: 3590,2940 3640,2940 3662.56,2962.56 3680,2962.56 3681.46,2961.1 3745,2961.1 3779.37,2961.1 3810,2930.47 ; 3590,3515 3635,3515 3657.56,3537.56 3680,3537.56 3681.46,3536.1 3745,3536.1 3779.37,3536.1 3810,3505.47 ; 3775,3230 3775,3065.47 3810,3030.47 3810,2989.53 ; 3775,3805 3775,3640.47 3810,3605.47 3810,3564.53 ; 9935,3260 9935,3310 ; 9968.98,3393.86 9968.98,3335.08 9994.06,3310
  Top Layer w40: 10279.53,3421.42 v4(10279.53,3503.69) ; 10281.53,3277 10281.53,3419.42 ; 10302.83,3735 v4(10302.83,3802)
  Bottom Layer w8: v1(1845,1335) 1845,1305 1860,1290 1860,1145 1890,1115 1890,880 1925,845 v1(1980,845) ; v1(2770,1335) 2770,1305 2785,1290 2785,1145 2815,1115 2815,880 2850,845 v1(2905,845) ; v1(3695,1335) 3695,1305 3710,1290 3710,1145 3740,1115 3740,880 3775,845 v1(3830,845) ; v1(4620,1335) 4620,1305 4635,1290 4635,1145 4665,1115 4665,880 4700,845 v1(4755,845) ; v1(5545,1335) 5545,1305 5560,1290 5560,1145 5590,1115 5590,880 5625,845 v1(5680,845)
  other v1: 4145.04,3070.55

## Polygon pours and split planes (outlines as drawn)
no net on Top Layer "Top Layer-No Net" (solid, remove dead copper, pour order 60): 9847.83,4102 9847.83,3447 10032.83,3447 10032.83,3342 10087.83,3342 10087.83,3547 10357.83,3547 10357.83,3697 10092.83,3697 10092.83,4102
+12VCC2 on Top Layer "Top Layer-No Net" (solid, remove dead copper, pour order 100): 17 vertices, not listed, extent 3905,3440 5090,3835
3.3VCC on Top Layer "Top Layer-No Net" (solid, remove dead copper, pour order 97): 5017.58,2008.31 5017.58,2100.31 4987.58,2100.31 4987.58,2161.31 4815.58,2161.31 4815.58,2008.31
GND on Top Layer "Top Layer-No Net" (solid, remove dead copper, pour order 96): 5229.58,2412.31 5102.58,2412.31 5102.58,2357.31 5188.58,2357.31 5188.58,2250.31 5108.58,2250.31 5108.58,2196.31 5157.58,2196.31 5157.58,2225.31 5229.58,2225.31
GND on Top Layer "Top Layer-No Net" (solid, remove dead copper, pour order 94): 5046.58,2210.31 5046.58,2180.31 4815.58,2180.31 4815.58,2414.31 4991.58,2414.31 4991.58,2298.31 4950.58,2298.31 4950.58,2210.31
NetC24_2 on Top Layer "Top Layer-No Net" (solid, remove dead copper, pour order 95): 5111.58,2259.31 5101.58,2259.31 5101.58,2284.31 5101.58,2349.31 5176.58,2349.31 5176.58,2309.31 5111.58,2309.31
NetL2_1 on Top Layer "Top Layer-No Net" (solid, remove dead copper, pour order 93): 5094.58,2172.31 5038.58,2172.31 5038.58,2014.31 5094.58,2014.31
GND on Top Layer "Top Layer-No Net" (solid, remove dead copper, pour order 81): 1250,1115 1540,1115 1540,1025 1900,1025 1900,1115 2150,1115 2150,875 1885,875 1885,810 1860,810 1860,885 1510,885 1510,875 1250,875
SW on Top Layer "Mechanical 15-No Net" (solid, pour order 63): 17 vertices, not listed, extent 5600,2125 5785,2420
+12VCC1 on Top Layer "Mechanical 15-No Net" (solid, remove dead copper, pour order 62): 5750,2145 5770,2145 5770,2180 5780,2180 5780,2245 5740,2245 5740,2180 5750,2180
GND on Top Layer "Mechanical 15-No Net" (solid, pour order 75): 5730,2085 5730,2115 5590,2115 5590,1840 5685,1840 5685,1930 5720,1930 5720,1995 5625,1995 5625,2085
SW on Top Layer "Mechanical 15-No Net" (solid, pour order 69): 5745,2000 5745,2065 5730,2065 5730,2075 5630,2075 5630,2000
+12VCC1 on Top Layer "Mechanical 15-No Net" (solid, pour order 61): 5755,2055 5785,2055 5785,1995 5895,1995 5895,1845 5730,1845 5730,1930 5740,1930 5740,1995 5755,1995
NetR32_DriverChannelDRV88251_2 on Top Layer "Mechanical 15-No Net" (solid, remove dead copper, pour order 74): 1844,645 1716.28,645 1716.28,730 1736,730 1736,864 1749,864 1749,780 1844,718
NetR33_DriverChannelDRV88251_2 on Top Layer "Mechanical 15-No Net" (solid, remove dead copper, pour order 68): 1567,645 1695,645 1695,720 1673,720 1673,754.96 1673.01,861 1661,861 1661,770 1567,721
+5VCC on Top Layer "Mechanical 15-No Net" (solid, pour order 76): 5485,2030 5485,2215 5490,2220 5535,2220 5535,2450 5415,2450 5415,2140 5335,2140 5335,2085 5280,2085 5280,1775 5380,1775 5380,2030
NetC22_1 on Top Layer "Top Layer-No Net" (solid, remove dead copper, pour order 92): 5093.58,2440.04 5094.58,2256.31 5039.58,2256.31 5039.58,2238.31 5000.58,2238.31 5000.58,2289.31 5049.58,2289.31 5048.58,2440.04 5028.58,2440.04 5028.58,2485.04 5138.58,2485.04 5138.58,2440.04
+12VCC3 on Top Layer "Top Layer-No Net" (solid, remove dead copper, pour order 103): 18 vertices, not listed, extent 3895,3100 5095,3526.39
NetF2_1 on Top Layer "Top Layer-No Net" (solid, remove dead copper, pour order 99): 5105,3830 5105,3535 5990,3535 5990,3750 5765,3750 5765,3830
NetF1_1 on Top Layer "Top Layer-No Net" (solid, remove dead copper, pour order 102): 5990,3110 5990,3530 5095,3530 5095,3200 5520,3200 5520,3110
NetF3_1 on Top Layer "Top Layer-No Net" (solid, remove dead copper, pour order 106): 5975,2710 5975,3100 5510,3100 5510,3195 5100,3195 5100,2995 5280,2995 5280,2885 5465,2885 5465,2825 5520,2825 5520,2710
+12VCC1 on Top Layer "Top Layer-No Net" (solid, remove dead copper, pour order 91): 1250,240 1440,240 1440,290 1375,290 1375,530 1510,530 1510,715 1250,715
+12VCC1 on Top Layer "Top Layer-No Net" (solid, remove dead copper, pour order 86): 1900,715 2150,715 2150,240 1970,240 1970,285 2025,285 2025,530 1900,530
+12VCC1 on Top Layer "Top Layer-No Net" (solid, remove dead copper, pour order 85): 3750,715 4000,715 4000,240 3820,240 3820,285 3875,285 3875,530 3750,530
+12VCC1 on Top Layer "Top Layer-No Net" (solid, remove dead copper, pour order 90): 3100,240 3290,240 3290,290 3225,290 3225,530 3360,530 3360,715 3100,715
NetR33_DriverChannelDRV88253_2 on Top Layer "Mechanical 15-No Net" (solid, remove dead copper, pour order 67): 3417,645 3545,645 3545,720 3523,720 3523,754.96 3523.01,861 3511,861 3511,770 3417,721
NetR32_DriverChannelDRV88253_2 on Top Layer "Mechanical 15-No Net" (solid, remove dead copper, pour order 73): 3694,645 3566.28,645 3566.28,730 3586,730 3586,864 3599,864 3599,780 3694,718
GND on Top Layer "Top Layer-No Net" (solid, remove dead copper, pour order 80): 3100,1115 3390,1115 3390,1025 3750,1025 3750,1115 4000,1115 4000,875 3735,875 3735,810 3710,810 3710,885 3360,885 3360,875 3100,875
+12VCC1 on Top Layer "Top Layer-No Net" (solid, remove dead copper, pour order 84): 2825,715 3075,715 3075,240 2895,240 2895,285 2950,285 2950,530 2825,530
+12VCC1 on Top Layer "Top Layer-No Net" (solid, remove dead copper, pour order 89): 2175,240 2365,240 2365,290 2300,290 2300,530 2435,530 2435,715 2175,715
NetR33_DriverChannelDRV88252_2 on Top Layer "Mechanical 15-No Net" (solid, remove dead copper, pour order 66): 2492,645 2620,645 2620,720 2598,720 2598,754.96 2598.01,861 2586,861 2586,770 2492,721
NetR32_DriverChannelDRV88252_2 on Top Layer "Mechanical 15-No Net" (solid, remove dead copper, pour order 72): 2769,645 2641.28,645 2641.28,730 2661,730 2661,864 2674,864 2674,780 2769,718
GND on Top Layer "Top Layer-No Net" (solid, remove dead copper, pour order 79): 2175,1115 2465,1115 2465,1025 2825,1025 2825,1115 3075,1115 3075,875 2810,875 2810,810 2785,810 2785,885 2435,885 2435,875 2175,875
+12VCC1 on Top Layer "Top Layer-No Net" (solid, remove dead copper, pour order 83): 5600,715 5850,715 5850,240 5670,240 5670,285 5725,285 5725,530 5600,530
+12VCC1 on Top Layer "Top Layer-No Net" (solid, remove dead copper, pour order 88): 4950,240 5140,240 5140,290 5075,290 5075,530 5210,530 5210,715 4950,715
NetR33_DriverChannelDRV88255_2 on Top Layer "Mechanical 15-No Net" (solid, remove dead copper, pour order 65): 5267,645 5395,645 5395,720 5373,720 5373,754.96 5373.01,861 5361,861 5361,770 5267,721
NetR32_DriverChannelDRV88255_2 on Top Layer "Mechanical 15-No Net" (solid, remove dead copper, pour order 71): 5544,645 5416.28,645 5416.28,730 5436,730 5436,864 5449,864 5449,780 5544,718
GND on Top Layer "Top Layer-No Net" (solid, remove dead copper, pour order 78): 4950,1115 5240,1115 5240,1025 5600,1025 5600,1115 5850,1115 5850,875 5585,875 5585,810 5560,810 5560,885 5210,885 5210,875 4950,875
+12VCC1 on Top Layer "Top Layer-No Net" (solid, remove dead copper, pour order 82): 4675,715 4925,715 4925,240 4745,240 4745,285 4800,285 4800,530 4675,530
+12VCC1 on Top Layer "Top Layer-No Net" (solid, remove dead copper, pour order 87): 4025,240 4215,240 4215,290 4150,290 4150,530 4285,530 4285,715 4025,715
NetR33_DriverChannelDRV88254_2 on Top Layer "Mechanical 15-No Net" (solid, remove dead copper, pour order 64): 4342,645 4470,645 4470,720 4448,720 4448,754.96 4448.01,861 4436,861 4436,770 4342,721
NetR32_DriverChannelDRV88254_2 on Top Layer "Mechanical 15-No Net" (solid, remove dead copper, pour order 70): 4619,645 4491.28,645 4491.28,730 4511,730 4511,864 4524,864 4524,780 4619,718
GND on Top Layer "Top Layer-No Net" (solid, remove dead copper, pour order 77): 4025,1115 4315,1115 4315,1025 4675,1025 4675,1115 4925,1115 4925,875 4660,875 4660,810 4635,810 4635,885 4285,885 4285,875 4025,875
+12VCC1 on Top Layer "Top Layer-No Net" (solid, remove dead copper, pour order 104): 23 vertices, not listed, extent 4700,2470 5990,3190
+12VCC1 on Bottom Layer "Mechanical 15-No Net" (solid, pour order 54): 5771.79,1930 5771.79,1990 5820,1990 5820,2180 5745,2180 5745,2245 5895,2245 5895,1930
SW on Bottom Layer "Mechanical 15-No Net" (solid, pour order 55): 5710,2200 5710,2000 5630,2000 5630,2200
NetF2_1 on Bottom Layer "Top Layer-No Net" (solid, remove dead copper, pour order 98): 5105,3830 5105,3535 5990,3535 5990,3750 5765,3750 5765,3830
NetF1_1 on Bottom Layer "Top Layer-No Net" (solid, remove dead copper, pour order 101): 5990,3110 5990,3530 5095,3530 5095,3200 5520,3200 5520,3110
NetF3_1 on Bottom Layer "Top Layer-No Net" (solid, remove dead copper, pour order 105): 5975,2710 5975,3100 5510,3100 5510,3195 5100,3195 5100,2995 5280,2995 5280,2885 5465,2885 5465,2825 5520,2825 5520,2710
INPUT_GND on Groun Plane (split plane): 1001.4,2751.4 1003.05,2750.29 1005,2749.9 1484.9,2749.9 1484.9,2325.1 20.1,2325.1 20.1,3074.9 677.89,3074.9
GND on Groun Plane (split plane): 22 vertices, not listed, extent 20.1,20.1 5979.9,3979.9
+12VCC1 on Power Plane (split plane): 5779.9,2180.1 5745.1,2180.1 5745.1,2244.9 5779.9,2244.9
+5VCC on Power Plane (split plane): 49 vertices, not listed, extent 5450.98,2215.98 5519.02,2284.02
+12VCC1 on Power Plane (split plane): 49 vertices, not listed, extent 5512.01,727.01 5587.99,802.99
+12VCC1 on Power Plane (split plane): 49 vertices, not listed, extent 5222.01,732.01 5297.99,807.99
no net on Power Plane (split plane): 57 vertices, not listed, extent 4943.29,3663.29 5066.71,3786.71
no net on Power Plane (split plane): 57 vertices, not listed, extent 4743.29,3663.29 4866.71,3786.71
+12VCC1 on Power Plane (split plane): 49 vertices, not listed, extent 4297.01,732.01 4372.99,807.99
+12VCC1 on Power Plane (split plane): 49 vertices, not listed, extent 3372.01,732.01 3447.99,807.99
+12VCC1 on Power Plane (split plane): 49 vertices, not listed, extent 4657.01,657.01 4732.99,732.99
+12VCC1 on Power Plane (split plane): 49 vertices, not listed, extent 4587.01,727.01 4662.99,802.99
+12VCC1 on Power Plane (split plane): 49 vertices, not listed, extent 5582.01,657.01 5657.99,732.99
+12VCC1 on Power Plane (split plane): 49 vertices, not listed, extent 5142.01,657.01 5217.99,732.99
+12VCC1 on Power Plane (split plane): 49 vertices, not listed, extent 3732.01,657.01 3807.99,732.99
+12VCC1 on Power Plane (split plane): 49 vertices, not listed, extent 3662.01,727.01 3737.99,802.99
+12VCC1 on Power Plane (split plane): 49 vertices, not listed, extent 4217.01,657.01 4292.99,732.99
3.3VCC on Power Plane (split plane): 21 vertices, not listed, extent 2645.1,2960.1 5979.9,3549.9
no net on Power Plane (split plane): 20 vertices, not listed, extent 20.1,3105.1 5979.9,3979.9
+12VCC1 on Power Plane (split plane): 49 vertices, not listed, extent 2737.01,727.01 2812.99,802.99
+5VCC on Power Plane (split plane): 25 vertices, not listed, extent 20.1,1705.1 5664.9,3094.9
+12VCC1 on Power Plane (split plane): 49 vertices, not listed, extent 2447.01,732.01 2522.99,807.99
+12VCC1 on Power Plane (split plane): 49 vertices, not listed, extent 1522.01,732.01 1597.99,807.99
+12VCC1 on Power Plane (split plane): 49 vertices, not listed, extent 1812.01,727.01 1887.99,802.99
+12VCC1 on Power Plane (split plane): 22 vertices, not listed, extent 1230.1,20.1 5979.9,2949.9
3.3VCC on Power Plane (split plane): 24 vertices, not listed, extent 20.1,20.1 5664.9,2589.9
+12VCC1 on Power Plane (split plane): 49 vertices, not listed, extent 3292.01,657.01 3367.99,732.99
+12VCC1 on Power Plane (split plane): 49 vertices, not listed, extent 2807.01,657.01 2882.99,732.99
+12VCC1 on Power Plane (split plane): 49 vertices, not listed, extent 1882.01,657.01 1957.99,732.99
+12VCC1 on Power Plane (split plane): 49 vertices, not listed, extent 1442.01,657.01 1517.99,732.99
+12VCC1 on Power Plane (split plane): 49 vertices, not listed, extent 2367.01,657.01 2442.99,732.99

## Keep-outs
Keep-Out Layer:
  lines w10: 25,25 5975,25 5975,3975 25,3975 25,25

## Other copper
Groun Plane (plane layer: these items are gaps in the copper):
  lines w10: -10,2320 1490,2320 1490,2755 1005,2755 680,3080 0,3080
Power Plane (plane layer: these items are gaps in the copper):
  circle w10: c1480,695 r43.01
  circle w10: c1560,770 r43.01
  circle w10: c1850,765 r43.01
  circle w10: c1920,695 r43.01
  circle w10: c2845,695 r43.01
  circle w10: c2775,765 r43.01
  circle w10: c2485,770 r43.01
  circle w10: c2405,695 r43.01
  circle w10: c3770,695 r43.01
  circle w10: c3700,765 r43.01
  circle w10: c3410,770 r43.01
  circle w10: c3330,695 r43.01
  circle w10: c4695,695 r43.01
  circle w10: c4625,765 r43.01
  circle w10: c4335,770 r43.01
  circle w10: c4255,695 r43.01
  circle w10: c5620,695 r43.01
  circle w10: c5550,765 r43.01
  circle w10: c5260,770 r43.01
  circle w10: c5180,695 r43.01
  circle w10: c5485,2250 r39.05
  circle w10: c4805,3725 r66.71
  circle w10: c5005,3725 r66.71
  lines w10: 0,2595 4730,2595 5235,2090 5235,1700 5670,1700 ; 10,3100 2640,3100 ; 1230,0 1225,5 1225,1025 5605,1025 5605,1145 5670,1210 5670,2460 5165,2460 5165,2955 ; 6000,2955 5165,2955 ; 6005,3580.2 6005.1,3580.1 6010,3585 5775,3350 4697.76,3350 4642.76,3405 4150,3405 3415,3405 3265,3555 2640,3555 2640,3100 ; 2640,3100 2645,3100 2790,2955 4895,2955 5165,2955 ; 5740,2175 5740,2245 5740,2250 5785,2250 5785,2175 5740,2175

## Silkscreen, mask and mechanical layers (free items; w line width, h text height)
Top Overlay:
  lines w10: 3915,0 3915,235 3920,240 4000,240 ; 5990,0 6000,-10 ; 40,3775 40,3955 220,3955 220,3930 220,3775 40,3775 ; 50,45 230,45 230,200 230,225 50,225 50,45 ; 5780,40 5780,220 5960,220 5960,195 5960,40 5780,40 ; 5780,3780 5960,3780 5960,3935 5960,3960 5780,3960 5780,3780
  text "MOSFETS" at 4685,3840 h100
  text "HeatBed" at 4690,3540 h100
  text "Motors/Logic" at 4695,3215 h100
  text "G" at 3709,2565 h250
  text "3.3V 2A" at 4880,1705 h100
  text "5V 3A" at 5510,1705 h100
  text "End-Stops" at 455,1555 h200
  text "3.3V" at 1945,1355 h100 r90
  text "GND" at 2470,1355 h100 r90
  text "STEP" at 2570,1355 h100 r90
  text "EN" at 2670,1355 h100 r90
  text "DIR" at 2770,1355 h100 r90
  text "3.3V" at 2870,1355 h100 r90
  text "GND" at 3395,1355 h100 r90
  text "STEP" at 3495,1355 h100 r90
  text "EN" at 3595,1355 h100 r90
  text "DIR" at 3695,1355 h100 r90
  text "3.3V" at 3795,1355 h100 r90
  text "GND" at 4320,1355 h100 r90
  text "STEP" at 4420,1355 h100 r90
  text "EN" at 4520,1355 h100 r90
  text "DIR" at 4620,1355 h100 r90
  text "3.3V" at 4720,1355 h100 r90
  text "GND" at 5245,1355 h100 r90
  text "STEP" at 5345,1355 h100 r90
  text "EN" at 5445,1355 h100 r90
  text "DIR" at 5545,1355 h100 r90
  text "3.3V" at 5645,1355 h100 r90
  text "GND" at 1545,1350 h100 r90
  text "STEP" at 1645,1350 h100 r90
  text "EN" at 1745,1350 h100 r90
  text "DIR" at 1845,1350 h100 r90
  text "X" at 350,1270 h300
  text "Y" at 360,770 h300
  text "Z" at 355,265 h300
  text "X" at 1290,50 h300
  text "Y" at 2215,50 h300
  text "Z" at 3150,50 h300
  text "E0" at 3940,50 h300
  text "E1" at 4900,40 h300

## Text inside footprints (layer, text, board x,y; h text height)
FAN-0: Mechanical 16 "1" at 9880.33,2100.14 h62
FAN-1: Mechanical 16 "1" at 9880.33,2373.14 h62
FAN-2: Mechanical 16 "1" at 9880.33,1827.14 h62
HEAT-0: Mechanical 16 "1" at 9880.33,2919.14 h62
HEAT-1: Mechanical 16 "1" at 9880.33,2646.14 h62
HEATBED: Mechanical 16 "1" at 10018.33,3105.14 h62 r90
MAX1_EndstopChannel1: Mechanical 16 "1" at 607.5,1402.5 h62 r270
MAX1_EndstopChannel2: Mechanical 16 "1" at 607.5,402.5 h62 r270
MAX1_EndstopChannel3: Mechanical 16 "1" at 607.5,902.5 h62 r270
MIN1_EndstopChannel1: Mechanical 16 "1" at 1072.5,1082.5 h62 r90
MIN1_EndstopChannel2: Mechanical 16 "1" at 1072.5,82.5 h62 r90
MIN1_EndstopChannel3: Mechanical 16 "1" at 1072.5,582.5 h62 r90
T2_ThermocoupleChannel1: Mechanical 16 "1" at 3462.5,3882.5 h62 r180
T2_ThermocoupleChannel2: Mechanical 16 "1" at 3462.5,3307.5 h62 r180
U5: Top Overlay "TQFP 144" at 2252.64,1958.05 h49.6; Top Overlay "R" at 2497.27,2013.56 h37.2